# EAGLE board charger-lm317.old2 (EAGLE 7.6.0)

Size 160 x 100 mm. Coordinates in mm from the lower left corner, seen from the top.
Outline: 0,0 160,0 160,100 0,100 0,0
Copper layers (1*16): Top 0.035mm / dielectric 1.5mm / Bottom 0.035mm
Design rules "default": minimum track width 10mil, minimum drill 24mil, track to track 8mil, track to pad 8mil, pad to pad 8mil, via to via 8mil, smd to smd 8mil, copper to edge 40mil, drill to drill 8mil, minimum pad ring 10mil, minimum via ring 8mil, stop-mask expansion 4mil, vias tented up to drill 0mil, thermal gap 10mil

## Footprints (pad centres in the part's own frame; a part is rotated, then mirrored left to right if it is on the bottom)
E5-4 = drill 0.813 pad 1.905: + -2.54,0 | drill 0.813 pad 1.905 octagon: - 2.54,0
E5-5 = drill 0.813 pad 1.905: + -2.54,0 | drill 0.813 pad 1.905 octagon: - 2.54,0
DO35-7 = drill 0.7: A 3.81,0; C -3.81,0
317TL = drill 1.016 long: 1 -2.54,-3.81; 2 0,-3.81; 3 2.54,-3.81 | hole 3.302: 0,11.176
1X02 = drill 1.016 long: 1 -1.27,0; 2 1.27,0
LED5MM = drill 0.813 octagon: A -1.27,0; K 1.27,0
SPAD = drill 0.7 pad 1.676 octagon: 1 0,0
0202/2V = drill 0.813 octagon: 1 0,-1.27; 2 0,1.27
0202/5 = drill 0.813 octagon: 1 0,-2.54; 2 0,2.54
B25P = drill 0.813 octagon: A -2.54,0; E 2.54,0; S 0,2.54
0207/10 = drill 0.813 octagon: 1 -5.08,0; 2 5.08,0
0204/7 = drill 0.813 octagon: 1 -3.81,0; 2 3.81,0
TO92-CBE = drill 0.7 pad 1.422: B 0,0; C -2.54,0; E 2.54,0

## Placement (x,y rotation side)
C1  [E5-4]  45.72,22.86 270 top
C2  [E5-5]  60.96,22.86 270 top
D1  1N4148-7  [DO35-7]  35.56,36.83 270 top
IC1  [317TL]  48.26,34.29 0 top
JP1  [1X02]  55.88,21.59 270 top
LED1  [LED5MM]  62.23,30.48 0 top
P1  SPAD  [SPAD]  78.74,25.4 0 top
P2  SPAD  [SPAD]  22.86,40.64 0 top
R1  [0202/2V]  25.4,31.75 0 top
R2  2.2k  [0202/5]  30.48,27.94 180 top
R3  2.2k  [0202/5]  33.02,15.24 90 top
R4  [B25P]  30.48,20.32 90 top
R5  [0207/10]  68.58,25.4 270 top
R6  [0204/7]  30.48,36.83 90 top
R7  [0204/7]  50.8,16.51 270 top
T1  BC547CBE  [TO92-CBE]  38.1,22.86 270 top
T2  BC547CBE  [TO92-CBE]  45.72,12.7 90 top

## Library data of the parts
C1 C2 = c
D1 = d
IC1 = v-reg
JP1 = pinhead
LED1 = led
P1 P2 = pad
R1-R3 R5-R7 = r
R4 = pot
T1 T2 = t

## Nets
N$1: C1.+ IC1.1 R4.S T1.C
N$3: IC1.2 JP1.1 R3.1
N$4: C1.- C2.- D1.A R1.2 R6.1 T1.E
N$5: R2.2 R4.E
N$6: JP1.2 R1.1 R2.1 R7.1 T1.B
N$7: D1.C P2.1 R6.2 T2.E
N$8: R5.2 T2.C
N$9: LED1.K R5.1
N$10: C2.+ IC1.3 LED1.A P1.1
N$11: R3.2 R4.A
N$12: R7.2 T2.B

## Tracks (layer width: path | path; a pad name or v marks a point on that pad's centre or on a via)
N$1  (3 unrouted)
N$3  (2 unrouted)
N$4  (5 unrouted)
N$5  (1 unrouted)
N$6  (4 unrouted)
N$7  (3 unrouted)
N$8  (1 unrouted)
N$9  (1 unrouted)
N$10  (3 unrouted)
N$11  (1 unrouted)
N$12  (1 unrouted)